# Altium PCB PMM_MSPC_22A.PcbDoc (part 3 of 5)
Units mm, origin at the board's own origin, x right, y up, seen from the top; angles counter-clockwise.
Board outline 86.91 x 61.9 mm, 4 copper layers (Top Layer, GroundPlane, MidLayer1, Bottom Layer); 159 components, 129 nets, 534 pads, 221 vias.
Unrouted connection lines stored in the file: 36.
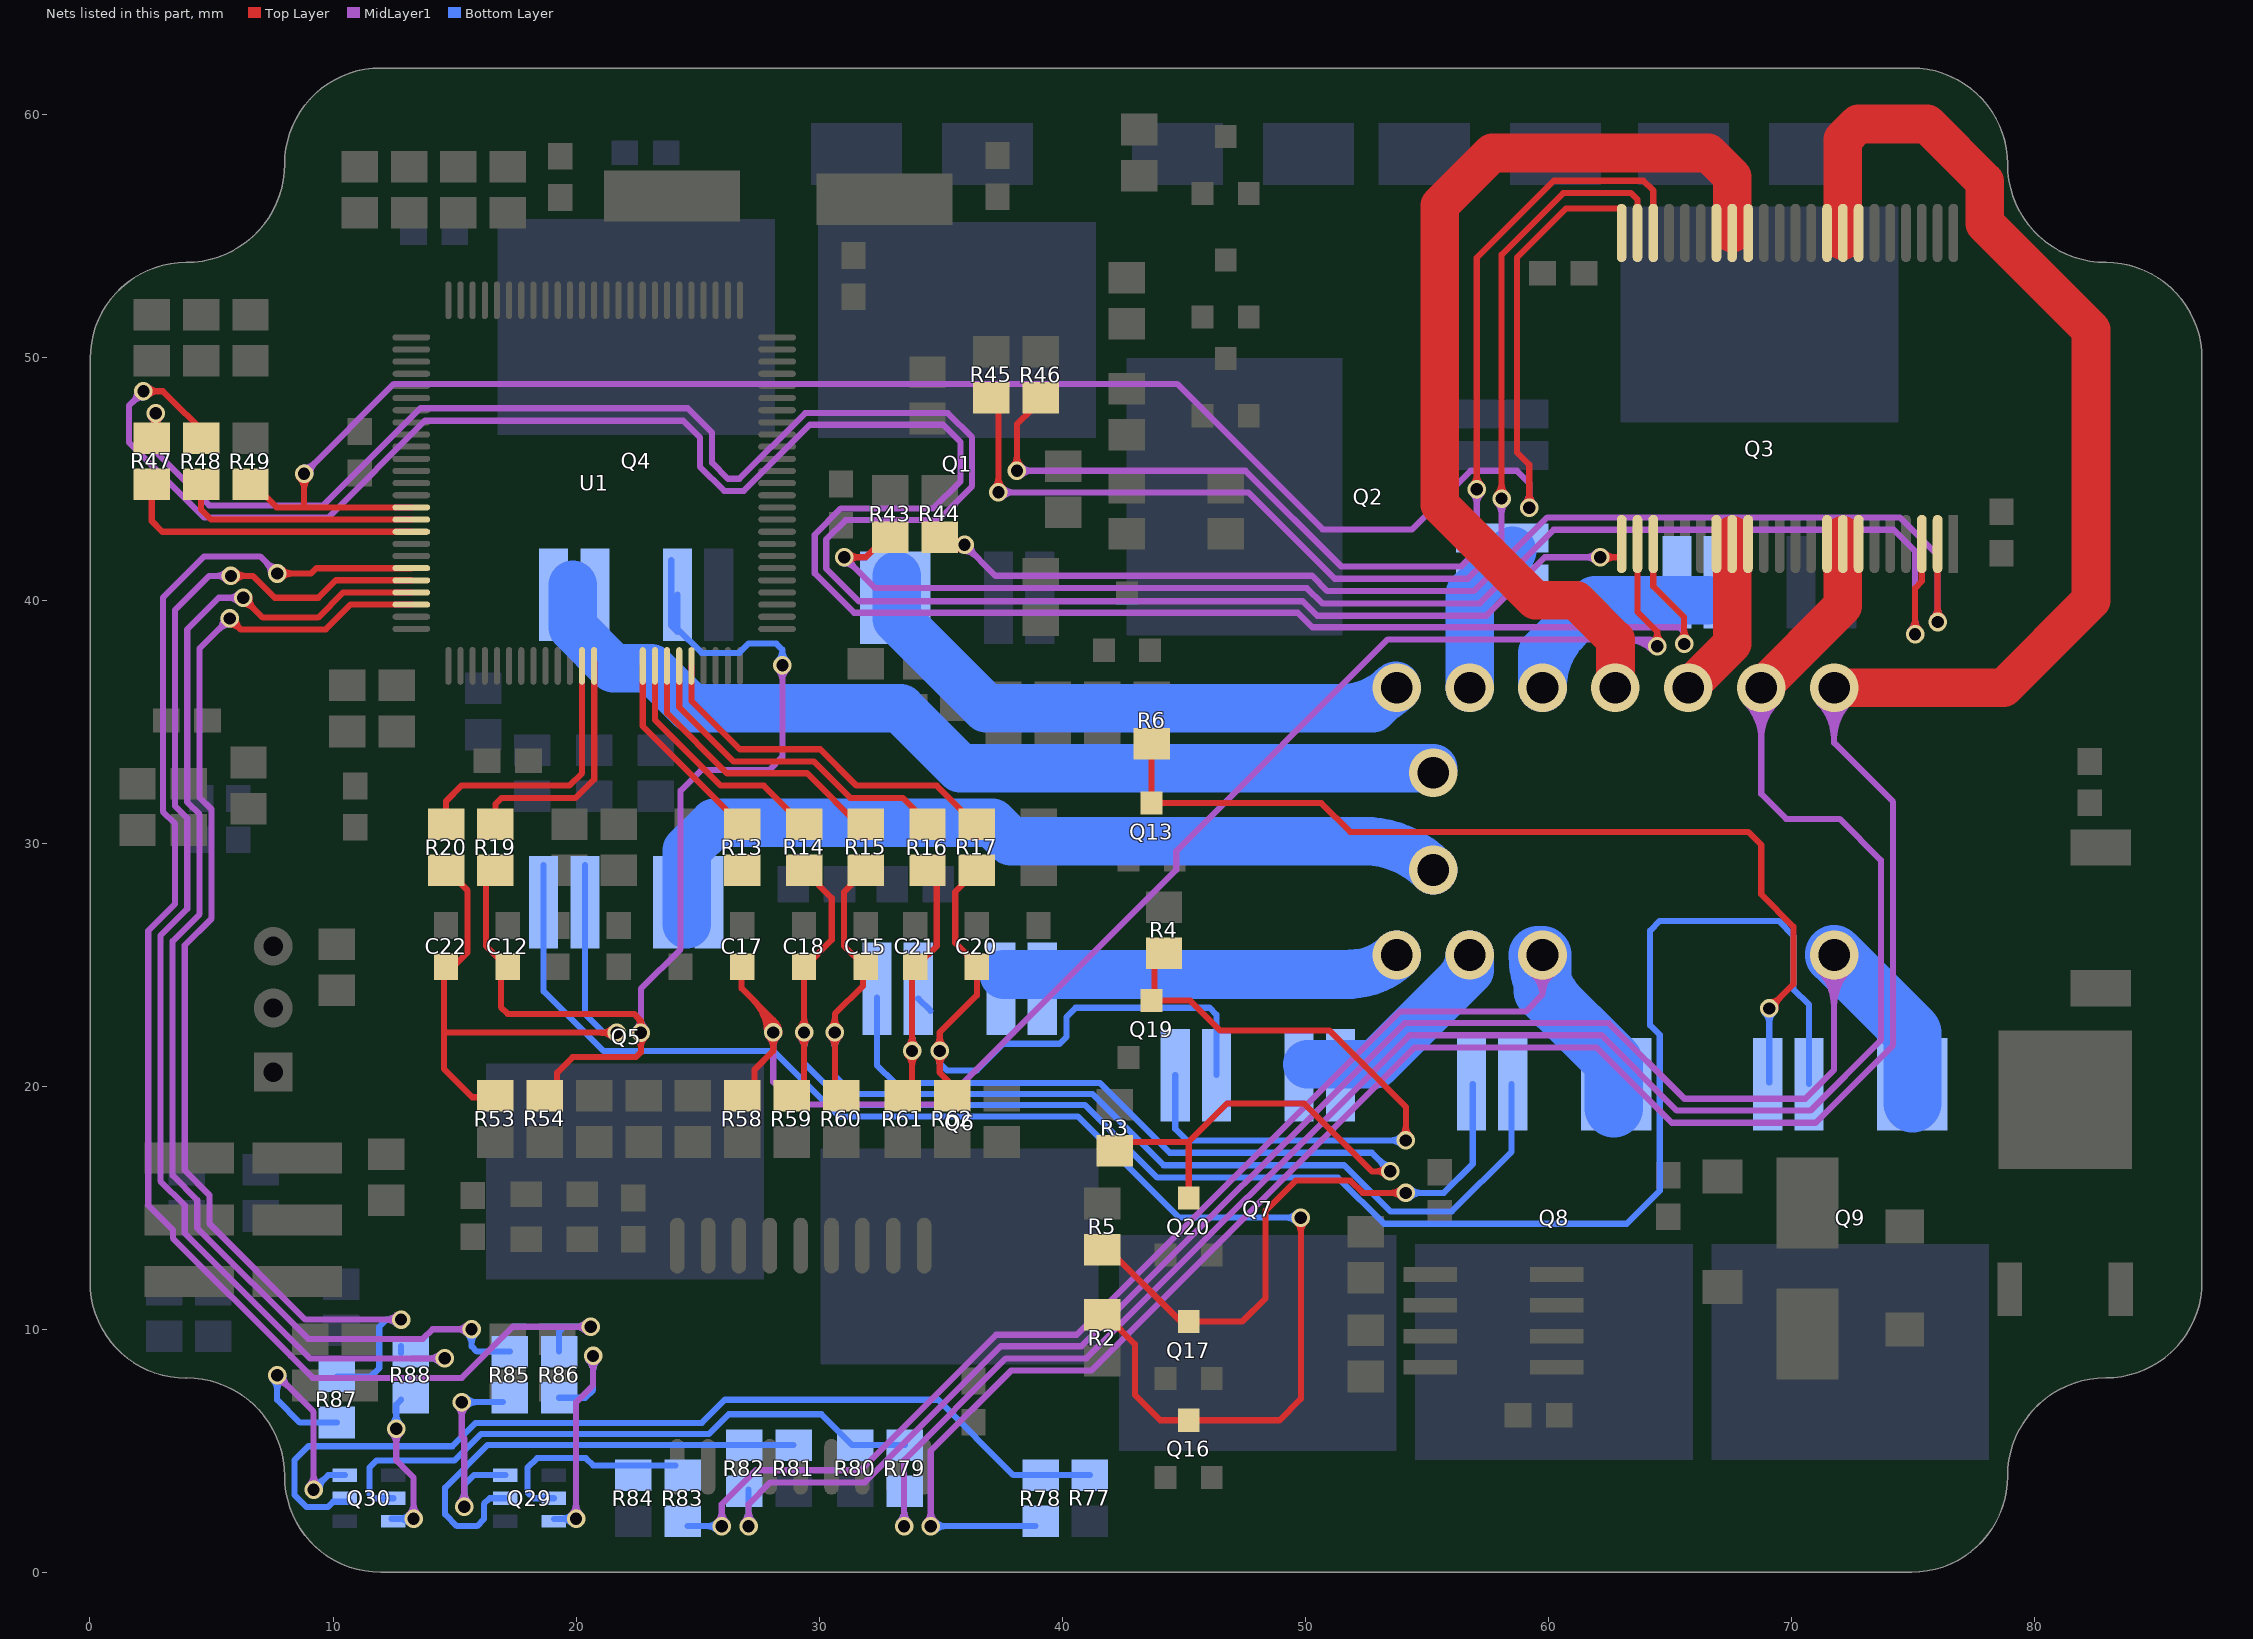
[diagram p5: the nets of this part, all layers, seen from the top]

## Via types
v1: diameter 0.762, hole 0.508, Top Layer to Bottom Layer, 138 vias
v2: diameter 2, hole 1.3, Top Layer to Bottom Layer, 26 vias
v3: diameter 1.27, hole 0.711, Top Layer to Bottom Layer, tented top, 23 vias
v4: diameter 0.762, hole 0.508, Top Layer to Bottom Layer, tented bottom, 21 vias
v5: diameter 1.27, hole 0.711, Top Layer to Bottom Layer, 7 vias
v6: diameter 0.762, hole 0.508, Top Layer to Bottom Layer, tented both sides, 5 vias
v7: diameter 2.5, hole 2.6, Top Layer to Bottom Layer, 1 vias

## Nets (pads, with @x,y where several pads share a name; then routed paths per layer and width w, separated by ;. In a path a pad name is that pad's centre, name@x,y a point inside that pad or via, vN(x,y) a via of type N, cw(c..) or ccw(c..) an arc to the next point about the centre after c; other vN are vias at no path point) (continued)
HC4feedback: C12.1 Q4.2 R19.1 R19.2 R54.1 U1.88 | length 83.9
  Top Layer w0.254: R19.2@16.302,29.325 16.302,25.769 16.911,25.16 16.911,23.255 17.191,22.975 22.395,22.975 22.67,22.7 ; R19.1@16.683,31.291 16.683,31.611 16.937,31.865 19.985,31.865 20.747,32.627 U1.88@20.747,37.453 ; R54.1@19.223,19.419 19.223,20.562 19.858,21.197 22.467,21.197 22.67,21.4 22.67,22.7 ; 22.469,22.901 cw(c21.937,22.369) v1(22.67,22.2) ; 22.469,22.901 cw(c21.937,22.369) v1(22.67,22.2) ; 22.469,22.901 cw(c21.937,22.369) v1(22.67,22.2) ; 22.469,22.901 cw(c21.937,22.369) v1(22.67,22.2) ; 22.469,22.901 cw(c21.937,22.369) v1(22.67,22.2) ; v1@22.49,22.02 cw(c22.057,21.587) 22.67,21.587 ; v1@22.49,22.02 cw(c22.057,21.587) 22.67,21.587 ; v1@22.49,22.02 cw(c22.057,21.587) 22.67,21.587 ; v1@22.49,22.02 cw(c22.057,21.587) 22.67,21.587 ; v1@22.49,22.02 cw(c22.057,21.587) 22.67,21.587 ; v1@22.52,22.405 ccw(c22.305,22.7) 22.67,22.7 ; v1@22.52,22.405 ccw(c22.305,22.7) 22.67,22.7 ; v1@22.52,22.405 ccw(c22.305,22.7) 22.67,22.7 ; v1@22.52,22.405 ccw(c22.305,22.7) 22.67,22.7 ; v1@22.52,22.405 ccw(c22.305,22.7) 22.67,22.7 ; 22.67,21.587 cw(c23.283,21.587) v1@22.85,22.02 ; 22.67,21.587 cw(c23.283,21.587) v1@22.85,22.02 ; 22.67,21.587 cw(c23.283,21.587) v1@22.85,22.02 ; 22.67,21.587 cw(c23.283,21.587) v1@22.85,22.02 ; 22.67,21.587 cw(c23.283,21.587) v1@22.85,22.02 ; 22.67,22.7 ccw(c23.035,22.7) v1@22.82,22.405 ; 22.67,22.7 ccw(c23.035,22.7) v1@22.82,22.405 ; 22.67,22.7 ccw(c23.035,22.7) v1@22.82,22.405 ; 22.67,22.7 ccw(c23.035,22.7) v1@22.82,22.405 ; 22.67,22.7 ccw(c23.035,22.7) v1@22.82,22.405
  MidLayer1 w0.254: v1(22.67,22.2) 22.67,24.009 24.303,25.642 24.303,32.159 25.152,33.008 27.946,33.008 28.494,33.556 v4(28.494,37.326) ; v1@22.49,22.38 ccw(c22.057,22.813) 22.67,22.813 ; v1@22.49,22.38 ccw(c22.057,22.813) 22.67,22.813 ; v1@22.49,22.38 ccw(c22.057,22.813) 22.67,22.813 ; v1@22.49,22.38 ccw(c22.057,22.813) 22.67,22.813 ; v1@22.49,22.38 ccw(c22.057,22.813) 22.67,22.813 ; 22.67,22.813 ccw(c23.283,22.813) v1@22.85,22.38 ; 22.67,22.813 ccw(c23.283,22.813) v1@22.85,22.38 ; 22.67,22.813 ccw(c23.283,22.813) v1@22.85,22.38 ; 22.67,22.813 ccw(c23.283,22.813) v1@22.85,22.38 ; 22.67,22.813 ccw(c23.283,22.813) v1@22.85,22.38 ; v4@28.314,37.146 cw(c27.881,36.713) 28.494,36.713 ; v4@28.314,37.146 cw(c27.881,36.713) 28.494,36.713 ; v4@28.314,37.146 cw(c27.881,36.713) 28.494,36.713 ; v4@28.314,37.146 cw(c27.881,36.713) 28.494,36.713 ; v4@28.314,37.146 cw(c27.881,36.713) 28.494,36.713 ; 28.494,36.713 cw(c29.107,36.713) v4@28.674,37.146 ; 28.494,36.713 cw(c29.107,36.713) v4@28.674,37.146 ; 28.494,36.713 cw(c29.107,36.713) v4@28.674,37.146 ; 28.494,36.713 cw(c29.107,36.713) v4@28.674,37.146 ; 28.494,36.713 cw(c29.107,36.713) v4@28.674,37.146
  Bottom Layer w0.254: Q4.2@23.922,41.644 23.922,38.954 Q4.2@24.175,38.701 ; Q4.2@24.175,40.225 24.175,38.825 25.166,37.834 26.716,37.834 27.097,38.215 28.24,38.215 28.494,37.961 v4(28.494,37.326) ; v4@28.314,37.506 ccw(c27.881,37.939) 28.494,37.939 ; v4@28.314,37.506 ccw(c27.881,37.939) 28.494,37.939 ; v4@28.314,37.506 ccw(c27.881,37.939) 28.494,37.939 ; v4@28.314,37.506 ccw(c27.881,37.939) 28.494,37.939 ; v4@28.314,37.506 ccw(c27.881,37.939) 28.494,37.939 ; 28.494,37.939 ccw(c29.107,37.939) v4@28.674,37.506 ; 28.494,37.939 ccw(c29.107,37.939) v4@28.674,37.506 ; 28.494,37.939 ccw(c29.107,37.939) v4@28.674,37.506 ; 28.494,37.939 ccw(c29.107,37.939) v4@28.674,37.506 ; 28.494,37.939 ccw(c29.107,37.939) v4@28.674,37.506
HC5drive: Q5.1 Q16.3 R2.1 | length 68.9
  Top Layer w0.254: R2.1@41.54,10.463 41.917,10.463 43,9.38 43,7.296 44.041,6.255 48.955,6.255 49.83,7.13 v4(49.83,14.593) ; v4@49.65,14.413 cw(c49.217,13.98) 49.83,13.98 ; v4@49.65,14.413 cw(c49.217,13.98) 49.83,13.98 ; v4@49.65,14.413 cw(c49.217,13.98) 49.83,13.98 ; v4@49.65,14.413 cw(c49.217,13.98) 49.83,13.98 ; v4@49.65,14.413 cw(c49.217,13.98) 49.83,13.98 ; 49.83,13.98 cw(c50.443,13.98) v4@50.01,14.413 ; 49.83,13.98 cw(c50.443,13.98) v4@50.01,14.413 ; 49.83,13.98 cw(c50.443,13.98) v4@50.01,14.413 ; 49.83,13.98 cw(c50.443,13.98) v4@50.01,14.413 ; 49.83,13.98 cw(c50.443,13.98) v4@50.01,14.413
  Bottom Layer w0.254: Q5.1@18.667,29.093 18.667,23.912 21.128,21.451 28.113,21.451 30.804,18.76 40.65,18.76 44.817,14.593 v4(49.83,14.593) ; 49.217,14.593 ccw(c49.217,15.206) v4@49.65,14.773 ; 49.217,14.593 cw(c49.217,13.98) v4@49.65,14.413 ; 49.217,14.593 ccw(c49.217,15.206) v4@49.65,14.773 ; 49.217,14.593 cw(c49.217,13.98) v4@49.65,14.413 ; 49.217,14.593 ccw(c49.217,15.206) v4@49.65,14.773 ; 49.217,14.593 cw(c49.217,13.98) v4@49.65,14.413 ; 49.217,14.593 ccw(c49.217,15.206) v4@49.65,14.773 ; 49.217,14.593 cw(c49.217,13.98) v4@49.65,14.413 ; 49.217,14.593 ccw(c49.217,15.206) v4@49.65,14.773 ; 49.217,14.593 cw(c49.217,13.98) v4@49.65,14.413
HC5feedback: C22.1 Q5.2 R20.1 R20.2 R53.1 U1.87 | length 47
  Top Layer w0.254: 14.561,22.213 v1(21.67,22.2) ; R20.2@14.651,29.391 14.651,28.944 15.54,28.055 15.54,25.515 14.561,24.536 14.561,20.713 15.728,19.546 R53.1@16.81,19.546 ; R20.1@14.651,30.976 14.651,31.738 15.286,32.373 19.731,32.373 20.247,32.889 U1.87@20.247,37.294 ; 21.057,22.201 ccw(c21.058,22.814) v1@21.491,22.38 ; 21.057,22.201 cw(c21.056,21.588) v1@21.49,22.021 ; 21.057,22.201 ccw(c21.058,22.814) v1@21.491,22.38 ; 21.057,22.201 cw(c21.056,21.588) v1@21.49,22.021 ; 21.057,22.201 ccw(c21.058,22.814) v1@21.491,22.38 ; 21.057,22.201 cw(c21.056,21.588) v1@21.49,22.021 ; 21.057,22.201 ccw(c21.058,22.814) v1@21.491,22.38 ; 21.057,22.201 cw(c21.056,21.588) v1@21.49,22.021 ; 21.057,22.201 ccw(c21.058,22.814) v1@21.491,22.38 ; 21.057,22.201 cw(c21.056,21.588) v1@21.49,22.021
  Bottom Layer w0.254: Q5.2@20.367,29.093 20.367,22.974 21.128,22.213 ; v1(21.67,22.2) 21.128,22.213 ; 21.128,22.213 ccw(c21.139,22.664) v1@21.479,22.367 ; 21.128,22.213 cw(c21.117,21.762) v1@21.471,22.042 ; 21.128,22.213 ccw(c21.139,22.664) v1@21.479,22.367 ; 21.128,22.213 cw(c21.117,21.762) v1@21.471,22.042 ; 21.128,22.213 ccw(c21.139,22.664) v1@21.479,22.367 ; 21.128,22.213 cw(c21.117,21.762) v1@21.471,22.042 ; 21.128,22.213 ccw(c21.139,22.664) v1@21.479,22.367 ; 21.128,22.213 cw(c21.117,21.762) v1@21.471,22.042 ; 21.128,22.213 ccw(c21.139,22.664) v1@21.479,22.367 ; 21.128,22.213 cw(c21.117,21.762) v1@21.471,22.042
HC6drive: Q6.1 Q20.3 R3.1 | length 50.9
  Top Layer w0.254: R3.1@42.1,17.7 45.2,17.7 46.785,19.285 49.964,19.285 52.751,16.498 v1(53.513,16.498) ; Q20.3@45.212,15.399 45.212,17.688 ; 52.9,16.498 ccw(c52.9,17.111) v1@53.333,16.678 ; 52.9,16.498 cw(c52.9,15.885) v1@53.333,16.318 ; 52.9,16.498 ccw(c52.9,17.111) v1@53.333,16.678 ; 52.9,16.498 cw(c52.9,15.885) v1@53.333,16.318 ; 52.9,16.498 ccw(c52.9,17.111) v1@53.333,16.678 ; 52.9,16.498 cw(c52.9,15.885) v1@53.333,16.318 ; 52.9,16.498 ccw(c52.9,17.111) v1@53.333,16.678 ; 52.9,16.498 cw(c52.9,15.885) v1@53.333,16.318 ; 52.9,16.498 ccw(c52.9,17.111) v1@53.333,16.678 ; 52.9,16.498 cw(c52.9,15.885) v1@53.333,16.318
  Bottom Layer w0.254: Q6.1@32.383,23.658 32.383,20.864 33.107,20.14 41.556,20.14 44.436,17.26 52.751,17.26 v1(53.513,16.498) ; 53.079,16.932 ccw(c53.513,17.365) v1@53.513,16.752 ; 53.079,16.932 cw(c52.646,16.498) v1@53.259,16.498 ; 53.079,16.932 ccw(c53.513,17.365) v1@53.513,16.752 ; 53.079,16.932 cw(c52.646,16.498) v1@53.259,16.498 ; 53.079,16.932 ccw(c53.513,17.365) v1@53.513,16.752 ; 53.079,16.932 cw(c52.646,16.498) v1@53.259,16.498 ; 53.079,16.932 ccw(c53.513,17.365) v1@53.513,16.752 ; 53.079,16.932 cw(c52.646,16.498) v1@53.259,16.498 ; 53.079,16.932 ccw(c53.513,17.365) v1@53.513,16.752 ; 53.079,16.932 cw(c52.646,16.498) v1@53.259,16.498
HC6feedback: C21.1 Q6.2 R16.1 R16.2 R61.1 U1.95 | length 40.9
  Top Layer w0.254: U1.95@24.247,37.294 24.247,35.604 26.494,33.357 29.796,33.357 31.288,31.865 33.447,31.865 R16.1@34.844,30.468 ; R61.1@33.828,19.419 33.828,24.88 33.983,25.035 34.11,25.035 34.844,25.769 R16.2@34.844,28.69 ; v1@33.648,21.271 cw(c33.215,20.838) 33.828,20.838 ; v1@33.648,21.271 cw(c33.215,20.838) 33.828,20.838 ; v1@33.648,21.271 cw(c33.215,20.838) 33.828,20.838 ; v1@33.648,21.271 cw(c33.215,20.838) 33.828,20.838 ; v1@33.648,21.271 cw(c33.215,20.838) 33.828,20.838 ; v1@33.648,21.631 ccw(c33.215,22.064) 33.828,22.064 ; v1@33.648,21.631 ccw(c33.215,22.064) 33.828,22.064 ; v1@33.648,21.631 ccw(c33.215,22.064) 33.828,22.064 ; v1@33.648,21.631 ccw(c33.215,22.064) 33.828,22.064 ; v1@33.648,21.631 ccw(c33.215,22.064) 33.828,22.064 ; 33.828,20.838 cw(c34.441,20.838) v1@34.008,21.271 ; 33.828,20.838 cw(c34.441,20.838) v1@34.008,21.271 ; 33.828,20.838 cw(c34.441,20.838) v1@34.008,21.271 ; 33.828,20.838 cw(c34.441,20.838) v1@34.008,21.271 ; 33.828,20.838 cw(c34.441,20.838) v1@34.008,21.271 ; 33.828,22.064 ccw(c34.441,22.064) v1@34.008,21.631 ; 33.828,22.064 ccw(c34.441,22.064) v1@34.008,21.631 ; 33.828,22.064 ccw(c34.441,22.064) v1@34.008,21.631 ; 33.828,22.064 ccw(c34.441,22.064) v1@34.008,21.631 ; 33.828,22.064 ccw(c34.441,22.064) v1@34.008,21.631
  Bottom Layer w0.254: v1(33.828,21.451) Q6.2@33.828,22.975 ; Q6.2@34.083,23.609 Q6.2@34.59,23.102 ; v1@33.648,21.631 ccw(c33.215,22.064) 33.828,22.064 ; v1@33.648,21.631 ccw(c33.215,22.064) 33.828,22.064 ; v1@33.648,21.631 ccw(c33.215,22.064) 33.828,22.064 ; v1@33.648,21.631 ccw(c33.215,22.064) 33.828,22.064 ; v1@33.648,21.631 ccw(c33.215,22.064) 33.828,22.064 ; 33.828,22.064 ccw(c34.441,22.064) v1@34.008,21.631 ; 33.828,22.064 ccw(c34.441,22.064) v1@34.008,21.631 ; 33.828,22.064 ccw(c34.441,22.064) v1@34.008,21.631 ; 33.828,22.064 ccw(c34.441,22.064) v1@34.008,21.631 ; 33.828,22.064 ccw(c34.441,22.064) v1@34.008,21.631
HC7drive: Q7.1 Q19.3 R4.1 | length 36.9
  Top Layer w0.254: Q19.3@43.688,23.527 45.273,23.527 46.5,22.3 51,22.3 54.148,19.152 v1(54.148,17.768) ; Q19.3@43.8,23.7 R4.1@43.8,25.4 ; v1@53.968,17.948 ccw(c53.535,18.381) 54.148,18.381 ; v1@53.968,17.948 ccw(c53.535,18.381) 54.148,18.381 ; v1@53.968,17.948 ccw(c53.535,18.381) 54.148,18.381 ; v1@53.968,17.948 ccw(c53.535,18.381) 54.148,18.381 ; v1@53.968,17.948 ccw(c53.535,18.381) 54.148,18.381 ; 54.148,18.381 ccw(c54.761,18.381) v1@54.328,17.948 ; 54.148,18.381 ccw(c54.761,18.381) v1@54.328,17.948 ; 54.148,18.381 ccw(c54.761,18.381) v1@54.328,17.948 ; 54.148,18.381 ccw(c54.761,18.381) v1@54.328,17.948 ; 54.148,18.381 ccw(c54.761,18.381) v1@54.328,17.948
  Bottom Layer w0.254: Q7.1@44.656,20.457 44.656,18.244 45.132,17.768 v1(54.148,17.768) ; 53.535,17.768 ccw(c53.535,18.381) v1@53.968,17.948 ; 53.535,17.768 cw(c53.535,17.155) v1@53.968,17.588 ; 53.535,17.768 ccw(c53.535,18.381) v1@53.968,17.948 ; 53.535,17.768 cw(c53.535,17.155) v1@53.968,17.588 ; 53.535,17.768 ccw(c53.535,18.381) v1@53.968,17.948 ; 53.535,17.768 cw(c53.535,17.155) v1@53.968,17.588 ; 53.535,17.768 ccw(c53.535,18.381) v1@53.968,17.948 ; 53.535,17.768 cw(c53.535,17.155) v1@53.968,17.588 ; 53.535,17.768 ccw(c53.535,18.381) v1@53.968,17.948 ; 53.535,17.768 cw(c53.535,17.155) v1@53.968,17.588
HC7feedback: C20.1 Q7.2 R17.1 R17.2 R62.1 U1.96 | length 59.7
  Top Layer w0.254: U1.96@24.747,37.294 24.747,35.866 26.748,33.865 30.05,33.865 31.542,32.373 34.844,32.373 36.495,30.722 R17.1@36.749,30.722 ; R62.1@36.114,19.419 34.971,20.562 34.971,22.213 36.495,23.737 36.495,25.007 35.606,25.896 35.606,27.994 R17.2@36.495,28.883 ; v1@34.791,21.271 cw(c34.358,20.838) 34.971,20.838 ; v1@34.791,21.271 cw(c34.358,20.838) 34.971,20.838 ; v1@34.791,21.271 cw(c34.358,20.838) 34.971,20.838 ; v1@34.791,21.271 cw(c34.358,20.838) 34.971,20.838 ; v1@34.791,21.271 cw(c34.358,20.838) 34.971,20.838 ; v1@34.791,21.631 ccw(c34.358,22.064) 34.971,22.064 ; v1@34.791,21.631 ccw(c34.358,22.064) 34.971,22.064 ; v1@34.791,21.631 ccw(c34.358,22.064) 34.971,22.064 ; v1@34.791,21.631 ccw(c34.358,22.064) 34.971,22.064 ; v1@34.791,21.631 ccw(c34.358,22.064) 34.971,22.064 ; 34.971,20.838 cw(c35.584,20.838) v1@35.151,21.271 ; 34.971,20.838 cw(c35.584,20.838) v1@35.151,21.271 ; 34.971,20.838 cw(c35.584,20.838) v1@35.151,21.271 ; 34.971,20.838 cw(c35.584,20.838) v1@35.151,21.271 ; 34.971,20.838 cw(c35.584,20.838) v1@35.151,21.271 ; 34.971,22.064 ccw(c35.584,22.064) v1@35.151,21.631 ; 34.971,22.064 ccw(c35.584,22.064) v1@35.151,21.631 ; 34.971,22.064 ccw(c35.584,22.064) v1@35.151,21.631 ; 34.971,22.064 ccw(c35.584,22.064) v1@35.151,21.631 ; 34.971,22.064 ccw(c35.584,22.064) v1@35.151,21.631
  Bottom Layer w0.254: v1(34.971,21.451) 34.971,20.943 ; Q7.2@46.356,20.457 46.356,22.944 46.071,23.229 40.559,23.229 40.178,22.848 40.178,22.023 39.9,21.745 37.591,21.745 36.499,20.653 35.261,20.653 34.971,20.943 ; v1@34.819,21.248 cw(c34.59,20.943) 34.971,20.943 ; v1@34.819,21.248 cw(c34.59,20.943) 34.971,20.943 ; v1@34.819,21.248 cw(c34.59,20.943) 34.971,20.943 ; v1@34.819,21.248 cw(c34.59,20.943) 34.971,20.943 ; v1@34.819,21.248 cw(c34.59,20.943) 34.971,20.943 ; v1@34.819,21.248 cw(c34.59,20.943) 34.971,20.943 ; v1@34.819,21.248 cw(c34.59,20.943) 34.971,20.943 ; v1@34.819,21.248 cw(c34.59,20.943) 34.971,20.943 ; v1@34.819,21.248 cw(c34.59,20.943) 34.971,20.943 ; v1@34.819,21.248 cw(c34.59,20.943) 34.971,20.943 ; 34.971,20.943 cw(c35.352,20.943) v1@35.123,21.248 ; 34.971,20.943 cw(c35.352,20.943) v1@35.123,21.248 ; 34.971,20.943 cw(c35.352,20.943) v1@35.123,21.248 ; 34.971,20.943 cw(c35.352,20.943) v1@35.123,21.248 ; 34.971,20.943 cw(c35.352,20.943) v1@35.123,21.248 ; 34.971,20.943 cw(c35.352,20.943) v1@35.123,21.248 ; 34.971,20.943 cw(c35.352,20.943) v1@35.123,21.248 ; 34.971,20.943 cw(c35.352,20.943) v1@35.123,21.248 ; 34.971,20.943 cw(c35.352,20.943) v1@35.123,21.248 ; 34.971,20.943 cw(c35.352,20.943) v1@35.123,21.248
HC8drive: Q8.1 Q17.3 R5.1 | length 34.5
  Top Layer w0.254: R5.1@41.8,13.4 44.881,10.319 47.419,10.319 48.375,11.275 48.375,14.875 49.617,16.117 51.862,16.117 52.37,15.609 v1(54.148,15.609) ; 53.535,15.609 ccw(c53.535,16.222) v1@53.968,15.789 ; 53.535,15.609 cw(c53.535,14.996) v1@53.968,15.429 ; 53.535,15.609 ccw(c53.535,16.222) v1@53.968,15.789 ; 53.535,15.609 cw(c53.535,14.996) v1@53.968,15.429 ; 53.535,15.609 ccw(c53.535,16.222) v1@53.968,15.789 ; 53.535,15.609 cw(c53.535,14.996) v1@53.968,15.429 ; 53.535,15.609 ccw(c53.535,16.222) v1@53.968,15.789 ; 53.535,15.609 cw(c53.535,14.996) v1@53.968,15.429 ; 53.535,15.609 ccw(c53.535,16.222) v1@53.968,15.789 ; 53.535,15.609 cw(c53.535,14.996) v1@53.968,15.429
  Bottom Layer w0.254: v1(54.148,15.609) 55.709,15.609 56.9,16.8 Q8.1@56.9,20.088 ; v1@54.328,15.429 cw(c54.761,14.996) 54.761,15.609 ; v1@54.328,15.429 cw(c54.761,14.996) 54.761,15.609 ; v1@54.328,15.429 cw(c54.761,14.996) 54.761,15.609 ; v1@54.328,15.429 cw(c54.761,14.996) 54.761,15.609 ; v1@54.328,15.429 cw(c54.761,14.996) 54.761,15.609 ; v1@54.328,15.789 ccw(c54.761,16.222) 54.761,15.609 ; v1@54.328,15.789 ccw(c54.761,16.222) 54.761,15.609 ; v1@54.328,15.789 ccw(c54.761,16.222) 54.761,15.609 ; v1@54.328,15.789 ccw(c54.761,16.222) 54.761,15.609 ; v1@54.328,15.789 ccw(c54.761,16.222) 54.761,15.609
HC8feedback: C15.1 Q8.2 R15.1 R15.2 R60.1 U1.94 | length 72.6
  Top Layer w0.254: U1.94@23.747,37.294 23.747,35.342 26.208,32.881 29.51,32.881 R15.1@31.766,30.625 ; R60.1@30.653,19.546 30.653,22.975 31.811,24.133 31.811,24.992 31.034,25.769 31.034,27.994 R15.2@31.923,28.883 ; v1@30.473,22.033 cw(c30.04,21.6) 30.653,21.6 ; v1@30.473,22.033 cw(c30.04,21.6) 30.653,21.6 ; v1@30.473,22.033 cw(c30.04,21.6) 30.653,21.6 ; v1@30.473,22.033 cw(c30.04,21.6) 30.653,21.6 ; v1@30.473,22.033 cw(c30.04,21.6) 30.653,21.6 ; v1@30.473,22.393 ccw(c30.04,22.826) 30.653,22.826 ; v1@30.473,22.393 ccw(c30.04,22.826) 30.653,22.826 ; v1@30.473,22.393 ccw(c30.04,22.826) 30.653,22.826 ; v1@30.473,22.393 ccw(c30.04,22.826) 30.653,22.826 ; v1@30.473,22.393 ccw(c30.04,22.826) 30.653,22.826 ; 30.653,21.6 cw(c31.266,21.6) v1@30.833,22.033 ; 30.653,21.6 cw(c31.266,21.6) v1@30.833,22.033 ; 30.653,21.6 cw(c31.266,21.6) v1@30.833,22.033 ; 30.653,21.6 cw(c31.266,21.6) v1@30.833,22.033 ; 30.653,21.6 cw(c31.266,21.6) v1@30.833,22.033 ; 30.653,22.826 ccw(c31.266,22.826) v1@30.833,22.393 ; 30.653,22.826 ccw(c31.266,22.826) v1@30.833,22.393 ; 30.653,22.826 ccw(c31.266,22.826) v1@30.833,22.393 ; 30.653,22.826 ccw(c31.266,22.826) v1@30.833,22.393 ; 30.653,22.826 ccw(c31.266,22.826) v1@30.833,22.393
  Bottom Layer w0.254: v1(30.653,22.213) 30.653,20.435 31.403,19.685 41.249,19.685 44.182,16.752 51.608,16.752 53.513,14.847 56.047,14.847 58.5,17.3 Q8.2@58.5,20.088 ; v1@30.473,22.033 cw(c30.04,21.6) 30.653,21.6 ; v1@30.473,22.033 cw(c30.04,21.6) 30.653,21.6 ; v1@30.473,22.033 cw(c30.04,21.6) 30.653,21.6 ; v1@30.473,22.033 cw(c30.04,21.6) 30.653,21.6 ; v1@30.473,22.033 cw(c30.04,21.6) 30.653,21.6 ; 30.653,21.6 cw(c31.266,21.6) v1@30.833,22.033 ; 30.653,21.6 cw(c31.266,21.6) v1@30.833,22.033 ; 30.653,21.6 cw(c31.266,21.6) v1@30.833,22.033 ; 30.653,21.6 cw(c31.266,21.6) v1@30.833,22.033 ; 30.653,21.6 cw(c31.266,21.6) v1@30.833,22.033
HC9drive: Q9.1 Q13.3 R6.1 | length 40.9
  Top Layer w0.254: R6.1@43.688,34.102 Q13.3@43.688,31.655 50.675,31.655 51.862,30.468 68.232,30.468 68.77,29.93 68.77,27.9 70.1,26.57 70.1,24.2 v6(69.1,23.2) ; v6@69.1,23.454 ccw(c69.1,24.067) 69.534,23.634 ccw(c69.967,23.2) v6@69.354,23.2
  Bottom Layer w0.254: v6@68.92,23.02 cw(c68.487,22.587) 69.1,22.587 cw(c69.713,22.587) v6@69.28,23.02 ; Q9.1@69.1,20.148 v6(69.1,23.2)
HC9feedback: C18.1 Q9.2 R14.1 R14.2 R59.1 U1.93 | length 97.9
  Top Layer w0.254: U1.93@23.247,37.294 23.247,35.08 25.954,32.373 27.732,32.373 R14.1@29.129,30.976 ; R59.1@29.383,19.546 29.383,24.88 30.526,26.023 30.526,27.74 R14.2@29.383,28.883 ; v1@29.203,22.033 cw(c28.77,21.6) 29.383,21.6 ; v1@29.203,22.033 cw(c28.77,21.6) 29.383,21.6 ; v1@29.203,22.033 cw(c28.77,21.6) 29.383,21.6 ; v1@29.203,22.033 cw(c28.77,21.6) 29.383,21.6 ; v1@29.203,22.033 cw(c28.77,21.6) 29.383,21.6 ; v1@29.203,22.393 ccw(c28.77,22.826) 29.383,22.826 ; v1@29.203,22.393 ccw(c28.77,22.826) 29.383,22.826 ; v1@29.203,22.393 ccw(c28.77,22.826) 29.383,22.826 ; v1@29.203,22.393 ccw(c28.77,22.826) 29.383,22.826 ; v1@29.203,22.393 ccw(c28.77,22.826) 29.383,22.826 ; 29.383,21.6 cw(c29.996,21.6) v1@29.563,22.033 ; 29.383,21.6 cw(c29.996,21.6) v1@29.563,22.033 ; 29.383,21.6 cw(c29.996,21.6) v1@29.563,22.033 ; 29.383,21.6 cw(c29.996,21.6) v1@29.563,22.033 ; 29.383,21.6 cw(c29.996,21.6) v1@29.563,22.033 ; 29.383,22.826 ccw(c29.996,22.826) v1@29.563,22.393 ; 29.383,22.826 ccw(c29.996,22.826) v1@29.563,22.393 ; 29.383,22.826 ccw(c29.996,22.826) v1@29.563,22.393 ; 29.383,22.826 ccw(c29.996,22.826) v1@29.563,22.393 ; 29.383,22.826 ccw(c29.996,22.826) v1@29.563,22.393
  Bottom Layer w0.254: v1(29.383,22.213) 29.383,20.943 31.101,19.225 40.947,19.225 43.928,16.244 51.354,16.244 53.259,14.339 63.239,14.339 64.597,15.697 64.597,22.116 64.2,22.512 64.2,26.4 64.6,26.8 69.5,26.8 70.1,26.2 70.1,24 70.74,23.36 Q9.2@70.74,20.088 ; v1@29.203,22.033 cw(c28.77,21.6) 29.383,21.6 ; v1@29.203,22.033 cw(c28.77,21.6) 29.383,21.6 ; v1@29.203,22.033 cw(c28.77,21.6) 29.383,21.6 ; v1@29.203,22.033 cw(c28.77,21.6) 29.383,21.6 ; v1@29.203,22.033 cw(c28.77,21.6) 29.383,21.6 ; 29.383,21.6 cw(c29.996,21.6) v1@29.563,22.033 ; 29.383,21.6 cw(c29.996,21.6) v1@29.563,22.033 ; 29.383,21.6 cw(c29.996,21.6) v1@29.563,22.033 ; 29.383,21.6 cw(c29.996,21.6) v1@29.563,22.033 ; 29.383,21.6 cw(c29.996,21.6) v1@29.563,22.033
HI_current1: Q1.4 Q1.5 | length 33.6
  Bottom Layer w2: 33.193,41.009 33.193,39.231 36.876,35.548 52.788,35.548 53.725,36.485 cw(c51.463,38.747) 51.463,35.548 ; 51.713,35.548 ccw(c51.713,38.457) v2(53.77,36.4) ; 51.713,35.548 ccw(c51.713,38.457) v2(53.77,36.4) ; 51.713,35.548 ccw(c51.713,38.457) v2(53.77,36.4)
HI_current2: Q2.4 Q2.5 | length 6.4
  Bottom Layer w2: v2(56.77,36.4) 56.77,40.27 Q2.4@58.525,42.025
HI_current3: Q3.4 Q3.5 | length 17.4
  Bottom Layer w2: Q3.4@66.594,39.993 61.919,39.993 59.77,37.844 v2(59.77,36.4) ; v2(59.77,36.4) cw(c63.256,36.4) 60.791,38.865 ; v2(59.77,36.4) cw(c63.256,36.4) 60.791,38.865 ; v2(59.77,36.4) cw(c63.256,36.4) 60.791,38.865
HI_current4: Q4.4 Q4.5 | length 39.6
  Bottom Layer w2: 19.858,40.628 19.858,38.882 21.541,37.199 23.101,37.199 24.752,35.548 33.352,35.548 35.815,33.085 v2@55.27,33.085
  other v2: 55.27,32.9
HI_current5: Q5.4 Q5.5 | length 34.9
  Bottom Layer w2: 24.557,26.658 24.557,29.706 25.7,30.849 37.13,30.849 37.892,30.087 52.404,30.087 cw(c52.404,26.034) v2(55.27,28.9)
HI_current6: Q6.4 Q6.5 | length 16.4
  Bottom Layer w2: Q6.4@37.6,24.6 51.901,24.6 ; 51.901,24.626 ccw(c51.901,27.269) v2(53.77,25.4)
HI_current7: Q7.4 Q7.5 | length 12.5
  Bottom Layer w2: Q7.4@50.1,20.9 52.9,20.9 56.77,24.77 v2(56.77,25.4) ; 56.325,24.325 ccw(c55.249,25.4) v2(56.77,25.4) ; 56.325,24.325 ccw(c55.249,25.4) v2(56.77,25.4) ; 56.325,24.325 ccw(c55.249,25.4) v2(56.77,25.4)
HI_current8: Q8.4 Q8.5 R83.2 | length 66.7
  MidLayer1 w0.254: v1@25.82,2.08 ccw(c25.387,2.513) 26,2.513 ccw(c26.613,2.513) v1@26.18,2.08 ; v1(26,1.9) 26,2.8 27.4,4.2 31.714,4.2 37.289,9.775 40.603,9.775 53.903,23.075 59.075,23.075 59.77,23.77 ; v2@59.286,24.673 cw(c58.685,23.77) 59.77,23.77 ; v2@59.427,24.885 cw(c59.001,24.244) 59.77,24.244 cw(c60.539,24.244) v2@60.113,24.885 ; v2(59.77,25.4) 59.77,23.77 ; v2@60.254,24.673 ccw(c60.855,23.77) 59.77,23.77
  Bottom Layer w0.254: R83.2@24.6,1.9 v1(26,1.9) ; v1@25.82,1.72 ccw(c25.387,1.287) 25.387,1.9 ccw(c25.387,2.513) v1@25.82,2.08
  Bottom Layer w2.4: v2(59.77,25.4) 59.77,23.93 62.7,21 62.7,19.1 ; v2@59.57,25.4 ccw(c62.636,25.4) 60.468,23.232 ; v2@59.57,25.4 ccw(c62.636,25.4) 60.468,23.232 ; v2@59.57,25.4 ccw(c62.636,25.4) 60.468,23.232
HI_current9: Q9.4 Q9.5 R82.2 | length 76.9
  MidLayer1 w0.254: v1@26.92,2.08 ccw(c26.487,2.513) 27.1,2.513 ccw(c27.713,2.513) v1@27.28,2.08 ; v1(27.1,1.9) 27.1,2.8 28,3.7 31.886,3.7 37.486,9.3 40.8,9.3 54.1,22.6 62.5,22.6 65.615,19.485 70.585,19.485 71.77,20.67 v2(71.77,25.4) ; v2@71.153,24.783 cw(c69.662,23.292) 71.77,23.292 cw(c73.878,23.292) v2@72.387,24.783 ; v2@71.332,24.962 cw(c70.276,23.906) 71.77,23.906 cw(c73.264,23.906) v2@72.208,24.962
  Bottom Layer w0.254: v1@26.92,2.08 ccw(c26.487,2.513) 27.1,2.513 ccw(c27.713,2.513) v1@27.28,2.08 ; v1(27.1,1.9) R82.2@27.1,3.4
  Bottom Layer w2.4: v2(71.77,25.4) 71.77,25.43 75,22.2 75,19.3
HIC8_out: Q29.6 R85.2 | length 12.6
  MidLayer1 w0.254: v1@15.12,6.82 cw(c14.687,6.387) 15.3,6.387 cw(c15.913,6.387) v1@15.48,6.82 ; v1@15.22,2.88 ccw(c14.787,3.313) 15.4,3.313 ccw(c16.013,3.313) v1@15.58,2.88 ; v1(15.3,7) 15.3,5.6 15.4,5.5 v1(15.4,2.7)
  Bottom Layer w0.254: v1@15.22,2.88 ccw(c14.787,3.313) 15.4,3.313 ccw(c16.013,3.313) v1@15.58,2.88 ; v1(15.3,7) R85.2@17,7 ; v1(15.4,2.7) 15.4,3.6 15.798,3.998 Q29.6@17.088,3.998 ; v1@15.48,6.82 cw(c15.913,6.387) 15.913,7 cw(c15.913,7.613) v1@15.48,7.18
HIC8_ser: R85.1 U1.72 | length 55.8
  Top Layer w0.254: v1@6.3,39.846 cw(c6.3,39.233) 6.734,39.666 cw(c7.167,40.1) v1@6.554,40.1 ; v1(6.3,40.1) 7.115,39.285 9.385,39.285 10.419,40.319 U1.72@13.222,40.319
  MidLayer1 w0.254: v1@6.12,39.92 ccw(c5.687,39.487) 5.687,40.1 ccw(c5.687,40.713) v1@6.12,40.28 ; v1(6.3,40.1) 5.3,40.1 4,38.8 4,31.696 4.511,31.185 4.511,27.085 3.4,25.974 3.4,16.328 4.411,15.317 4.411,14.166 8.977,9.6 13.7,9.6 14.1,10 v1(15.7,10) ; v1@15.52,9.82 ccw(c15.087,9.387) 15.087,10 ccw(c15.087,10.613) v1@15.52,10.18
  Bottom Layer w0.254: v1@15.52,9.82 cw(c15.087,9.387) 15.7,9.387 cw(c16.313,9.387) v1@15.88,9.82 ; v1(15.7,10) 15.7,9.3 15.922,9.078 R85.1@17.272,9.078
HIC8_split: Q29.2 R83.1 R84.1 | length 8.6
  Bottom Layer w0.254: Q29.2@19.088,3.048 18.252,3.048 18,3.3 18,4.3 18.4,4.7 20.4,4.7 20.702,4.398 R83.1@24.084,4.398
HIC9_out: Q29.3 R86.2 | length 14.7
  MidLayer1 w0.254: v1@19.82,2.38 ccw(c19.387,2.813) 20,2.813 ccw(c20.613,2.813) v1@20.18,2.38 ; v1(20,2.2) 20,7 20.7,7.7 v1(20.7,8.9) ; v1@20.52,8.72 cw(c20.087,8.287) 20.7,8.287 cw(c21.313,8.287) v1@20.88,8.72
  Bottom Layer w0.254: Q29.3@19.098,2.198 v1@20,2.198 ; R86.2@19.304,7.178 20.378,7.178 20.7,7.5 v1(20.7,8.9) ; Q29.3@19.382,2.198 ccw(c19.382,2.818) v1@19.82,2.38 ; Q29.3@19.392,2.198 cw(c19.392,1.592) v1@19.82,2.02 ; v1@20.52,8.72 cw(c20.087,8.287) 20.7,8.287 cw(c21.313,8.287) v1@20.88,8.72
HIC9_ser: R86.1 U1.70 | length 65.2
  Top Layer w0.254: v1(7.7,41.1) 9.1,41.1 9.319,41.319 U1.70@13.222,41.319 ; v1@7.88,40.92 cw(c8.313,40.487) 8.313,41.1 cw(c8.313,41.713) v1@7.88,41.28
  MidLayer1 w0.254: v1@7.446,41.1 ccw(c6.833,41.1) 7.266,41.534 ccw(c7.7,41.967) v1@7.7,41.354 ; v1(7.7,41.1) 7,41.8 4.7,41.8 3,40.1 3,31.3 3.5,30.8 3.5,27.5 2.4,26.4 2.4,15.1 3.411,14.089 3.411,13.751 8.262,8.9 8.269,8.9 9.169,8 15.3,8 17.4,10.1 v1(20.6,10.1) ; v1@20.42,9.92 ccw(c19.987,9.487) 19.987,10.1 ccw(c19.987,10.713) v1@20.42,10.28
  Bottom Layer w0.254: R86.1@19.304,9.078 19.304,9.904 19.5,10.1 v1(20.6,10.1) ; v1@20.42,9.92 ccw(c19.987,9.487) 19.987,10.1 ccw(c19.987,10.713) v1@20.42,10.28
HIC9_split: Q29.5 R81.1 R82.1 | length 19.7
  Bottom Layer w0.254: Q29.5@17.088,3.048 16.448,3.048 16.211,2.811 16.211,2.185 15.926,1.9 15.1,1.9 14.611,2.389 14.611,3.485 16.356,5.23 R81.1@28.956,5.23
HiLo1: pad.29 pad.30 pad.31 | length 39.5
  Top Layer w1.6: v2(62.77,36.4) 62.77,38.38 61.15,40 59.475,40 55.545,43.93 55.545,56.249 57.704,58.408 66.594,58.408 67.58,57.422 pad.30@67.58,55.114
HiLo2: pad.14 pad.15 pad.16 | length 7
  Top Layer w1.6: v2(65.77,36.4) 67.58,38.21 pad.15@67.58,42.66
HiLo3: pad.7 pad.8 pad.9 R79.2 | length 87.1
  Top Layer w1.6: v2(68.77,36.4) 72.13,39.76 pad.8@72.13,42.66
  MidLayer1 w0.254: v1@33.32,2.08 ccw(c32.887,2.513) 33.5,2.513 ccw(c34.113,2.513) v1@33.68,2.08 ; v1(33.5,1.9) 33.5,4.607 37.693,8.8 41,8.8 54.3,22.1 62.2,22.1 65.3,19 70.8,19 73.7,21.9 73.7,29.3 72,31 69.8,31 68.77,32.03 v2(68.77,36.4) ; v2@68.153,35.783 cw(c66.662,34.292) 68.77,34.292 cw(c70.878,34.292) v2@69.387,35.783 ; v2@68.332,35.962 cw(c67.276,34.906) 68.77,34.906 cw(c70.264,34.906) v2@69.208,35.962
  Bottom Layer w0.254: v1@33.32,2.08 ccw(c32.887,2.513) 33.5,2.513 ccw(c34.113,2.513) v1@33.68,2.08 ; v1(33.5,1.9) R79.2@33.5,3.33
HiLo4: pad.36 pad.37 pad.38 R78.2 | length 122.1
  Top Layer w1.6: v2(71.77,36.4) 78.749,36.4 82.342,39.993 82.342,51.128 77.97,55.5 77.97,57.226 75.596,59.6 72.77,59.6 72.13,58.96 pad.37@72.13,54.8
  MidLayer1 w0.254: v1@34.42,2.08 ccw(c33.987,2.513) 34.6,2.513 ccw(c35.213,2.513) v1@34.78,2.08 ; v1(34.6,1.9) 34.6,5 37.9,8.3 41.207,8.3 54.507,21.6 61.993,21.6 65.093,18.5 71.007,18.5 74.2,21.693 74.2,31.7 71.77,34.13 v2(71.77,36.4) ; v2@71.153,35.783 cw(c69.662,34.292) 71.77,34.292 cw(c73.878,34.292) v2@72.387,35.783 ; v2@71.332,35.962 cw(c70.276,34.906) 71.77,34.906 cw(c73.264,34.906) v2@72.208,35.962
  Bottom Layer w0.254: v1(34.6,1.9) R78.2@38.9,1.9 ; v1@34.78,1.72 cw(c35.213,1.287) 35.213,1.9 cw(c35.213,2.513) v1@34.78,2.08
HL1_drive: pad.25 R46.1 | length 66
  Top Layer w0.254: v1(38.146,45.327) 38.146,47.246 38.767,47.867 R46.1@39.289,47.867 ; v1(57.069,44.565) 57.069,54.09 60.244,57.265 63.927,57.265 64.33,56.862 pad.25@64.33,55.114 ; v1@37.966,45.507 ccw(c37.533,45.94) 38.146,45.94 ; v1@37.966,45.507 ccw(c37.533,45.94) 38.146,45.94 ; v1@37.966,45.507 ccw(c37.533,45.94) 38.146,45.94 ; v1@37.966,45.507 ccw(c37.533,45.94) 38.146,45.94 ; v1@37.966,45.507 ccw(c37.533,45.94) 38.146,45.94 ; 38.146,45.94 ccw(c38.759,45.94) v1@38.326,45.507 ; 38.146,45.94 ccw(c38.759,45.94) v1@38.326,45.507 ; 38.146,45.94 ccw(c38.759,45.94) v1@38.326,45.507 ; 38.146,45.94 ccw(c38.759,45.94) v1@38.326,45.507 ; 38.146,45.94 ccw(c38.759,45.94) v1@38.326,45.507 ; v1@56.889,44.745 ccw(c56.456,45.178) 57.069,45.178 ; v1@56.889,44.745 ccw(c56.456,45.178) 57.069,45.178 ; v1@56.889,44.745 ccw(c56.456,45.178) 57.069,45.178 ; v1@56.889,44.745 ccw(c56.456,45.178) 57.069,45.178 ; v1@56.889,44.745 ccw(c56.456,45.178) 57.069,45.178 ; 57.069,45.178 ccw(c57.682,45.178) v1@57.249,44.745 ; 57.069,45.178 ccw(c57.682,45.178) v1@57.249,44.745 ; 57.069,45.178 ccw(c57.682,45.178) v1@57.249,44.745 ; 57.069,45.178 ccw(c57.682,45.178) v1@57.249,44.745 ; 57.069,45.178 ccw(c57.682,45.178) v1@57.249,44.745
  MidLayer1 w0.254: v1(38.146,45.327) 47.544,45.327 51.48,41.391 56.435,41.391 57.069,42.025 v1(57.069,44.565) ; v1@38.326,45.147 cw(c38.759,44.714) 38.759,45.327 ; v1@38.326,45.147 cw(c38.759,44.714) 38.759,45.327 ; v1@38.326,45.147 cw(c38.759,44.714) 38.759,45.327 ; v1@38.326,45.147 cw(c38.759,44.714) 38.759,45.327 ; v1@38.326,45.147 cw(c38.759,44.714) 38.759,45.327 ; v1@38.326,45.507 ccw(c38.759,45.94) 38.759,45.327 ; v1@38.326,45.507 ccw(c38.759,45.94) 38.759,45.327 ; v1@38.326,45.507 ccw(c38.759,45.94) 38.759,45.327 ; v1@38.326,45.507 ccw(c38.759,45.94) 38.759,45.327 ; v1@38.326,45.507 ccw(c38.759,45.94) 38.759,45.327 ; v1@56.889,44.385 cw(c56.456,43.952) 57.069,43.952 ; v1@56.889,44.385 cw(c56.456,43.952) 57.069,43.952 ; v1@56.889,44.385 cw(c56.456,43.952) 57.069,43.952 ; v1@56.889,44.385 cw(c56.456,43.952) 57.069,43.952 ; v1@56.889,44.385 cw(c56.456,43.952) 57.069,43.952 ; 57.069,43.952 cw(c57.682,43.952) v1@57.249,44.385 ; 57.069,43.952 cw(c57.682,43.952) v1@57.249,44.385 ; 57.069,43.952 cw(c57.682,43.952) v1@57.249,44.385 ; 57.069,43.952 cw(c57.682,43.952) v1@57.249,44.385 ; 57.069,43.952 cw(c57.682,43.952) v1@57.249,44.385
HL2_drive: pad.24 R45.1 | length 65.7
  Top Layer w0.254: v1(37.384,44.438) R45.1@37.384,48.06 ; v1(58.085,44.184) 58.085,54.217 60.625,56.757 63.419,56.757 63.68,56.496 pad.24@63.68,55.114 ; v1@37.204,44.618 ccw(c36.771,45.051) 37.384,45.051 ; v1@37.204,44.618 ccw(c36.771,45.051) 37.384,45.051 ; v1@37.204,44.618 ccw(c36.771,45.051) 37.384,45.051 ; v1@37.204,44.618 ccw(c36.771,45.051) 37.384,45.051 ; v1@37.204,44.618 ccw(c36.771,45.051) 37.384,45.051 ; 37.384,45.051 ccw(c37.997,45.051) v1@37.564,44.618 ; 37.384,45.051 ccw(c37.997,45.051) v1@37.564,44.618 ; 37.384,45.051 ccw(c37.997,45.051) v1@37.564,44.618 ; 37.384,45.051 ccw(c37.997,45.051) v1@37.564,44.618 ; 37.384,45.051 ccw(c37.997,45.051) v1@37.564,44.618 ; v1@57.905,44.364 ccw(c57.472,44.797) 58.085,44.797 ; v1@57.905,44.364 ccw(c57.472,44.797) 58.085,44.797 ; v1@57.905,44.364 ccw(c57.472,44.797) 58.085,44.797 ; v1@57.905,44.364 ccw(c57.472,44.797) 58.085,44.797 ; v1@57.905,44.364 ccw(c57.472,44.797) 58.085,44.797 ; 58.085,44.797 ccw(c58.698,44.797) v1@58.265,44.364 ; 58.085,44.797 ccw(c58.698,44.797) v1@58.265,44.364 ; 58.085,44.797 ccw(c58.698,44.797) v1@58.265,44.364 ; 58.085,44.797 ccw(c58.698,44.797) v1@58.265,44.364 ; 58.085,44.797 ccw(c58.698,44.797) v1@58.265,44.364
  MidLayer1 w0.254: v1(37.384,44.438) 47.671,44.438 51.226,40.883 56.705,40.883 58.085,42.263 v1(58.085,44.184) ; v1@37.564,44.258 cw(c37.997,43.825) 37.997,44.438 ; v1@37.564,44.258 cw(c37.997,43.825) 37.997,44.438 ; v1@37.564,44.258 cw(c37.997,43.825) 37.997,44.438 ; v1@37.564,44.258 cw(c37.997,43.825) 37.997,44.438 ; v1@37.564,44.258 cw(c37.997,43.825) 37.997,44.438 ; v1@37.564,44.618 ccw(c37.997,45.051) 37.997,44.438 ; v1@37.564,44.618 ccw(c37.997,45.051) 37.997,44.438 ; v1@37.564,44.618 ccw(c37.997,45.051) 37.997,44.438 ; v1@37.564,44.618 ccw(c37.997,45.051) 37.997,44.438 ; v1@37.564,44.618 ccw(c37.997,45.051) 37.997,44.438 ; v1@57.905,44.004 cw(c57.472,43.571) 58.085,43.571 ; v1@57.905,44.004 cw(c57.472,43.571) 58.085,43.571 ; v1@57.905,44.004 cw(c57.472,43.571) 58.085,43.571 ; v1@57.905,44.004 cw(c57.472,43.571) 58.085,43.571 ; v1@57.905,44.004 cw(c57.472,43.571) 58.085,43.571 ; 58.085,43.571 cw(c58.698,43.571) v1@58.265,44.004 ; 58.085,43.571 cw(c58.698,43.571) v1@58.265,44.004 ; 58.085,43.571 cw(c58.698,43.571) v1@58.265,44.004 ; 58.085,43.571 cw(c58.698,43.571) v1@58.265,44.004 ; 58.085,43.571 cw(c58.698,43.571) v1@58.265,44.004
HL3_drive: pad.3 R43.1 | length 75
  Top Layer w0.254: v4(31.034,41.771) 31.923,41.771 R43.1@32.685,42.533 ; v1(75.103,38.596) 75.103,40.501 75.38,40.778 pad.3@75.38,42.314 ; v4@31.214,41.591 cw(c31.647,41.158) 31.647,41.771 ; v4@31.214,41.591 cw(c31.647,41.158) 31.647,41.771 ; v4@31.214,41.591 cw(c31.647,41.158) 31.647,41.771 ; v4@31.214,41.591 cw(c31.647,41.158) 31.647,41.771 ; v4@31.214,41.591 cw(c31.647,41.158) 31.647,41.771 ; v4@31.214,41.951 ccw(c31.647,42.384) 31.647,41.771 ; v4@31.214,41.951 ccw(c31.647,42.384) 31.647,41.771 ; v4@31.214,41.951 ccw(c31.647,42.384) 31.647,41.771 ; v4@31.214,41.951 ccw(c31.647,42.384) 31.647,41.771 ; v4@31.214,41.951 ccw(c31.647,42.384) 31.647,41.771 ; v1@74.923,38.776 ccw(c74.49,39.209) 75.103,39.209 ; v1@74.923,38.776 ccw(c74.49,39.209) 75.103,39.209 ; v1@74.923,38.776 ccw(c74.49,39.209) 75.103,39.209 ; v1@74.923,38.776 ccw(c74.49,39.209) 75.103,39.209 ; v1@74.923,38.776 ccw(c74.49,39.209) 75.103,39.209 ; 75.103,39.209 ccw(c75.716,39.209) v1@75.283,38.776 ; 75.103,39.209 ccw(c75.716,39.209) v1@75.283,38.776 ; 75.103,39.209 ccw(c75.716,39.209) v1@75.283,38.776 ; 75.103,39.209 ccw(c75.716,39.209) v1@75.283,38.776 ; 75.103,39.209 ccw(c75.716,39.209) v1@75.283,38.776
  MidLayer1 w0.254: v4(31.034,41.771) 32.304,40.501 50.079,40.501 50.713,39.867 57.197,39.867 60.23,42.9 74.228,42.9 75.103,42.025 v1(75.103,38.596) ; v4@31.034,41.517 cw(c31.034,40.904) 31.468,41.337 ; v4@31.034,41.517 cw(c31.034,40.904) 31.468,41.337 ; v4@31.034,41.517 cw(c31.034,40.904) 31.468,41.337 ; v4@31.034,41.517 cw(c31.034,40.904) 31.468,41.337 ; v4@31.034,41.517 cw(c31.034,40.904) 31.468,41.337 ; v4@31.288,41.771 ccw(c31.901,41.771) 31.468,41.337 ; v4@31.288,41.771 ccw(c31.901,41.771) 31.468,41.337 ; v4@31.288,41.771 ccw(c31.901,41.771) 31.468,41.337 ; v4@31.288,41.771 ccw(c31.901,41.771) 31.468,41.337 ; v4@31.288,41.771 ccw(c31.901,41.771) 31.468,41.337 ; v1@74.923,38.776 ccw(c74.49,39.209) 75.103,39.209 ; v1@74.923,38.776 ccw(c74.49,39.209) 75.103,39.209 ; v1@74.923,38.776 ccw(c74.49,39.209) 75.103,39.209 ; v1@74.923,38.776 ccw(c74.49,39.209) 75.103,39.209 ; v1@74.923,38.776 ccw(c74.49,39.209) 75.103,39.209 ; 75.103,39.209 ccw(c75.716,39.209) v1@75.283,38.776 ; 75.103,39.209 ccw(c75.716,39.209) v1@75.283,38.776 ; 75.103,39.209 ccw(c75.716,39.209) v1@75.283,38.776 ; 75.103,39.209 ccw(c75.716,39.209) v1@75.283,38.776 ; 75.103,39.209 ccw(c75.716,39.209) v1@75.283,38.776
HL3_out: Q30.6 R87.2 | length 14.6
  MidLayer1 w0.254: v1@7.7,7.846 cw(c7.7,7.233) 8.134,7.666 cw(c8.567,8.1) v1@7.954,8.1 ; v1(7.7,8.1) 9.2,6.6 v1(9.2,3.4) ; v1@9.02,3.58 ccw(c8.587,4.013) 9.2,4.013 ccw(c9.813,4.013) v1@9.38,3.58
  Bottom Layer w0.254: v1@7.52,7.92 cw(c7.087,7.487) 7.7,7.487 cw(c8.313,7.487) v1@7.88,7.92 ; v1(7.7,8.1) 7.7,7.1 8.638,6.162 R87.2@10.16,6.162 ; v1(9.2,3.4) 9.798,3.998 Q30.6@10.484,3.998 ; v1@9.2,3.654 ccw(c9.2,4.267) 9.634,3.834 ccw(c10.067,3.4) v1@9.454,3.4
HL3_ser: R87.1 U1.73 | length 52.5
  Top Layer w0.254: v1@5.75,38.996 cw(c5.75,38.383) 6.184,38.816 cw(c6.617,39.25) v1@6.004,39.25 ; v1(5.75,39.25) 6.2,38.8 9.7,38.8 10.719,39.819 U1.73@13.222,39.819
  MidLayer1 w0.254: v1@5.496,39.25 cw(c4.883,39.25) 5.316,38.816 cw(c5.75,38.383) v1@5.75,38.996 ; v1(5.75,39.25) 4.5,38 4.5,31.9 5,31.4 5,26.9 3.9,25.8 3.9,16.535 4.911,15.524 4.911,14.352 8.863,10.4 v1(12.8,10.4) ; v1@12.62,10.22 ccw(c12.187,9.787) 12.187,10.4 ccw(c12.187,11.013) v1@12.62,10.58
  Bottom Layer w0.254: R87.1@10.16,8.062 11.562,8.062 11.9,8.4 11.9,10.1 12.2,10.4 ; v1@12.618,10.223 ccw(c12.2,9.818) 12.2,10.4 ; v1@12.618,10.577 cw(c12.2,10.982) 12.2,10.4 ; v1(12.8,10.4) 12.2,10.4
HL3_split: Q30.2 R79.1 R80.1 | length 25.6
  Bottom Layer w0.254: Q30.2@12.484,3.048 11.652,3.048 11.5,3.2 11.5,4.3 11.8,4.6 15,4.6 16.085,5.685 25.471,5.685 26.286,6.5 30.1,6.5 31.37,5.23 R79.1@33.528,5.23
HL4_drive: pad.2 R44.1 | length 68.8
  Top Layer w0.254: R44.1@35.098,42.279 v1(35.987,42.279) ; v1(76.03,39.104) pad.2@76.03,42.314 ; R44.1@35.374,42.279 ccw(c35.374,42.892) v1@35.807,42.459 ; R44.1@35.374,42.279 cw(c35.374,41.666) v1@35.807,42.099 ; R44.1@35.374,42.279 ccw(c35.374,42.892) v1@35.807,42.459 ; R44.1@35.374,42.279 cw(c35.374,41.666) v1@35.807,42.099 ; R44.1@35.374,42.279 ccw(c35.374,42.892) v1@35.807,42.459 ; R44.1@35.374,42.279 cw(c35.374,41.666) v1@35.807,42.099 ; R44.1@35.374,42.279 ccw(c35.374,42.892) v1@35.807,42.459 ; R44.1@35.374,42.279 cw(c35.374,41.666) v1@35.807,42.099 ; R44.1@35.374,42.279 ccw(c35.374,42.892) v1@35.807,42.459 ; R44.1@35.374,42.279 cw(c35.374,41.666) v1@35.807,42.099 ; v1@75.85,39.284 ccw(c75.416,39.717) 76.03,39.717 ; v1@75.85,39.284 ccw(c75.416,39.717) 76.03,39.717 ; v1@75.85,39.284 ccw(c75.416,39.717) 76.03,39.717 ; v1@75.85,39.284 ccw(c75.416,39.717) 76.03,39.717 ; v1@75.85,39.284 ccw(c75.416,39.717) 76.03,39.717 ; 76.03,39.717 ccw(c76.643,39.717) v1@76.209,39.284 ; 76.03,39.717 ccw(c76.643,39.717) v1@76.209,39.284 ; 76.03,39.717 ccw(c76.643,39.717) v1@76.209,39.284 ; 76.03,39.717 ccw(c76.643,39.717) v1@76.209,39.284 ; 76.03,39.717 ccw(c76.643,39.717) v1@76.209,39.284
  MidLayer1 w0.254: v1(35.987,42.279) 37.257,41.009 50.289,41.009 50.923,40.375 56.943,40.375 59.976,43.408 74.482,43.408 76.03,41.86 v1(76.03,39.104) ; v1@35.987,42.025 cw(c35.987,41.412) 36.421,41.845 ; v1@35.987,42.025 cw(c35.987,41.412) 36.421,41.845 ; v1@35.987,42.025 cw(c35.987,41.412) 36.421,41.845 ; v1@35.987,42.025 cw(c35.987,41.412) 36.421,41.845 ; v1@35.987,42.025 cw(c35.987,41.412) 36.421,41.845 ; v1@36.241,42.279 ccw(c36.854,42.279) 36.421,41.845 ; v1@36.241,42.279 ccw(c36.854,42.279) 36.421,41.845 ; v1@36.241,42.279 ccw(c36.854,42.279) 36.421,41.845 ; v1@36.241,42.279 ccw(c36.854,42.279) 36.421,41.845 ; v1@36.241,42.279 ccw(c36.854,42.279) 36.421,41.845 ; v1@75.85,39.284 ccw(c75.416,39.717) 76.03,39.717 ; v1@75.85,39.284 ccw(c75.416,39.717) 76.03,39.717 ; v1@75.85,39.284 ccw(c75.416,39.717) 76.03,39.717 ; v1@75.85,39.284 ccw(c75.416,39.717) 76.03,39.717 ; v1@75.85,39.284 ccw(c75.416,39.717) 76.03,39.717 ; 76.03,39.717 ccw(c76.643,39.717) v1@76.209,39.284 ; 76.03,39.717 ccw(c76.643,39.717) v1@76.209,39.284 ; 76.03,39.717 ccw(c76.643,39.717) v1@76.209,39.284 ; 76.03,39.717 ccw(c76.643,39.717) v1@76.209,39.284 ; 76.03,39.717 ccw(c76.643,39.717) v1@76.209,39.284
HL4_out: Q30.3 R88.2 | length 10
  MidLayer1 w0.254: v1@12.42,5.72 cw(c11.987,5.287) 12.6,5.287 cw(c13.213,5.287) v1@12.78,5.72 ; v1(12.6,5.9) 12.6,4.6 13.314,3.886 v1(13.314,2.2) ; v1@13.134,2.38 ccw(c12.701,2.813) 13.314,2.813 ccw(c13.927,2.813) v1@13.494,2.38
  Bottom Layer w0.254: Q30.3@12.408,2.2 v1(13.314,2.2) ; v1@12.42,6.08 ccw(c11.987,6.513) 12.6,6.513 ccw(c13.213,6.513) v1@12.78,6.08 ; v1(12.6,5.9) 12.6,6.9 R88.2@12.8,7.1 ; v1@13.134,2.02 ccw(c12.701,1.587) 12.701,2.2 ccw(c12.701,2.813) v1@13.134,2.38
HL4_ser: R88.1 U1.71 | length 56.1
  Top Layer w0.254: v1(5.8,41) 6.7,41 7.6,40.1 9.4,40.1 10.119,40.819 U1.71@13.222,40.819 ; v1@5.98,40.82 cw(c6.413,40.387) 6.413,41 cw(c6.413,41.613) v1@5.98,41.18
  MidLayer1 w0.254: v1@5.62,40.82 ccw(c5.187,40.387) 5.187,41 ccw(c5.187,41.613) v1@5.62,41.18 ; v1(5.8,41) 4.9,41 3.5,39.6 3.5,31.528 4,31.028 4,27.3 2.9,26.2 2.9,16.1 3.896,15.104 3.896,13.952 9.048,8.8 v1(14.6,8.8) ; v1@14.42,8.62 ccw(c13.987,8.187) 13.987,8.8 ccw(c13.987,9.413) v1@14.42,8.98
  Bottom Layer w0.254: R88.1@12.8,9 R88.1@12.8,9.3 ; R88.1@13.2,8.8 v1(14.6,8.8) ; v1@14.42,8.62 ccw(c13.987,8.187) 13.987,8.8 ccw(c13.987,9.413) v1@14.42,8.98
HL4_split: Q30.5 R77.1 R78.1 | length 39.1
  Bottom Layer w0.254: Q30.5@10.7,2.9 10,2.9 9.785,2.685 8.911,2.685 8.411,3.185 8.411,4.611 8.985,5.185 14.911,5.185 15.871,6.145 25.171,6.145 26.126,7.1 34.9,7.1 38.002,3.998 R77.1@41.148,3.998
HL12_disable: pad.22 R47.1 R47.2 U1.67 | length 110.7
  Top Layer w0.254: v1@2.52,47.52 cw(c2.087,47.087) 2.7,47.087 cw(c3.313,47.087) v1@2.88,47.52 ; R47.1@2.54,44.77 2.54,43.26 2.981,42.819 U1.67@13.222,42.819 ; R47.2@2.7,46.8 v1(2.7,47.7) ; v1(62.149,41.771) pad.22@63.038,41.771 ; v1@62.329,41.591 cw(c62.762,41.158) 62.762,41.771 ; v1@62.329,41.591 cw(c62.762,41.158) 62.762,41.771 ; v1@62.329,41.591 cw(c62.762,41.158) 62.762,41.771 ; v1@62.329,41.591 cw(c62.762,41.158) 62.762,41.771 ; v1@62.329,41.591 cw(c62.762,41.158) 62.762,41.771 ; v1@62.329,41.951 ccw(c62.762,42.384) 62.762,41.771 ; v1@62.329,41.951 ccw(c62.762,42.384) 62.762,41.771 ; v1@62.329,41.951 ccw(c62.762,42.384) 62.762,41.771 ; v1@62.329,41.951 ccw(c62.762,42.384) 62.762,41.771 ; v1@62.329,41.951 ccw(c62.762,42.384) 62.762,41.771
  MidLayer1 w0.254: v1@2.52,47.52 cw(c2.087,47.087) 2.7,47.087 cw(c3.313,47.087) v1@2.88,47.52 ; v1(2.7,47.7) 2.7,46.1 4.9,43.9 9.6,43.9 13.6,47.9 24.6,47.9 25.6,46.9 25.6,45.648 26.248,45 26.726,45 29.426,47.7 35.301,47.7 36.3,46.701 36.3,44.7 34.9,43.3 31.1,43.3 30.3,42.5 30.3,41.3 31.639,39.961 49.9,39.961 50.503,39.359 57.451,39.359 59.863,41.771 v1(62.149,41.771) ; 61.536,41.771 ccw(c61.536,42.384) v1@61.969,41.951 ; 61.536,41.771 cw(c61.536,41.158) v1@61.969,41.591 ; 61.536,41.771 ccw(c61.536,42.384) v1@61.969,41.951 ; 61.536,41.771 cw(c61.536,41.158) v1@61.969,41.591 ; 61.536,41.771 ccw(c61.536,42.384) v1@61.969,41.951 ; 61.536,41.771 cw(c61.536,41.158) v1@61.969,41.591 ; 61.536,41.771 ccw(c61.536,42.384) v1@61.969,41.951 ; 61.536,41.771 cw(c61.536,41.158) v1@61.969,41.591 ; 61.536,41.771 ccw(c61.536,42.384) v1@61.969,41.951 ; 61.536,41.771 cw(c61.536,41.158) v1@61.969,41.591
HL12_enable: pad.20 R48.1 R48.2 U1.66 | length 112.5
  Top Layer w0.254: v1(2.2,48.6) 3,48.6 R48.2@4.9,46.7 ; v1@2.38,48.42 cw(c2.813,47.987) 2.813,48.6 cw(c2.813,49.213) v1@2.38,48.78 ; R48.1@4.572,44.77 4.572,43.728 4.981,43.319 U1.66@13.222,43.319 ; pad.20@64.33,42.314 64.33,40.57 65.6,39.3 v6(65.6,38.2) ; v6@65.42,38.38 ccw(c64.987,38.813) 65.6,38.813 ccw(c66.213,38.813) v6@65.78,38.38
  MidLayer1 w0.254: v1@1.946,48.6 cw(c1.333,48.6) 1.766,48.166 cw(c2.2,47.733) v1@2.2,48.346 ; v1(2.2,48.6) 1.6,48 1.6,46.496 4.696,43.4 9.8,43.4 13.785,47.385 24.415,47.385 25.1,46.7 25.1,45.5 26.1,44.5 26.9,44.5 29.624,47.224 35.104,47.224 35.824,46.504 35.824,44.897 34.703,43.776 30.903,43.776 29.824,42.697 29.824,41.103 31.441,39.485 49.703,39.485 50.303,38.885 65.415,38.885 65.6,38.7 ; v6@65.45,38.405 ccw(c65.235,38.7) 65.6,38.7 ; 65.451,38.849 cw(c65.009,38.406) v6(65.6,38.2) 65.6,38.7 ; v6@65.75,38.405 cw(c65.965,38.7) 65.6,38.7
HL12_feedback: C17.1 pad.21 R13.1 R13.2 R58.1 U1.92 | length 96.7
  Top Layer w0.254: U1.92@22.747,37.294 22.747,34.818 R13.1@26.589,30.976 ; C17.1@26.811,25.035 26.811,24.023 28.113,22.721 ; R58.1@27.351,19.546 27.351,20.689 28.113,21.451 28.113,22.721 ; pad.21@63.68,42.314 63.68,39.52 64.5,38.7 ; v6@64.323,38.282 ccw(c63.918,38.7) 64.5,38.7 ; v6(64.5,38.1) 64.5,38.7 ; v6@64.677,38.282 cw(c65.082,38.7) 64.5,38.7 ; 27.32,23.514 cw(c26.019,22.213) v1@27.859,22.213 ; 27.32,23.514 cw(c26.019,22.213) v1@27.859,22.213 ; 27.32,23.514 cw(c26.019,22.213) v1@27.859,22.213 ; 27.32,23.514 cw(c26.019,22.213) v1@27.859,22.213 ; 27.32,23.514 cw(c26.019,22.213) v1@27.859,22.213 ; 27.754,23.08 cw(c26.887,22.213) v1(28.113,22.213) ; 27.754,23.08 cw(c26.887,22.213) v1(28.113,22.213) ; 27.754,23.08 cw(c26.887,22.213) v1(28.113,22.213) ; 27.754,23.08 cw(c26.887,22.213) v1(28.113,22.213) ; 27.754,23.08 cw(c26.887,22.213) v1(28.113,22.213) ; v1@27.933,22.033 cw(c27.5,21.6) 28.113,21.6 ; v1@27.933,22.033 cw(c27.5,21.6) 28.113,21.6 ; v1@27.933,22.033 cw(c27.5,21.6) 28.113,21.6 ; v1@27.933,22.033 cw(c27.5,21.6) 28.113,21.6 ; v1@27.933,22.033 cw(c27.5,21.6) 28.113,21.6 ; v1@27.961,22.416 ccw(c27.732,22.721) 28.113,22.721 ; v1@27.961,22.416 ccw(c27.732,22.721) 28.113,22.721 ; v1@27.961,22.416 ccw(c27.732,22.721) 28.113,22.721 ; v1@27.961,22.416 ccw(c27.732,22.721) 28.113,22.721 ; v1@27.961,22.416 ccw(c27.732,22.721) 28.113,22.721 ; 28.113,21.6 cw(c28.726,21.6) v1@28.293,22.033 ; 28.113,21.6 cw(c28.726,21.6) v1@28.293,22.033 ; 28.113,21.6 cw(c28.726,21.6) v1@28.293,22.033 ; 28.113,21.6 cw(c28.726,21.6) v1@28.293,22.033 ; 28.113,21.6 cw(c28.726,21.6) v1@28.293,22.033 ; 28.113,22.721 ccw(c28.494,22.721) v1@28.265,22.416 ; 28.113,22.721 ccw(c28.494,22.721) v1@28.265,22.416 ; 28.113,22.721 ccw(c28.494,22.721) v1@28.265,22.416 ; 28.113,22.721 ccw(c28.494,22.721) v1@28.265,22.416 ; 28.113,22.721 ccw(c28.494,22.721) v1@28.265,22.416 ; 28.187,22.647 cw(c27.754,22.213) v1@28.367,22.213 ; 28.187,22.647 cw(c27.754,22.213) v1@28.367,22.213 ; 28.187,22.647 cw(c27.754,22.213) v1@28.367,22.213 ; 28.187,22.647 cw(c27.754,22.213) v1@28.367,22.213 ; 28.187,22.647 cw(c27.754,22.213) v1@28.367,22.213
  MidLayer1 w0.254: v1(28.113,22.213) 28.113,20.181 29.042,19.252 35.052,19.252 44.7,28.9 44.7,29.674 53.411,38.385 64.215,38.385 v6(64.5,38.1) ccw(c63.812,37.412) 63.812,38.385 ; 63.199,38.385 cw(c63.199,36.799) v6@64.32,37.92 ; v1@27.933,22.033 cw(c27.5,21.6) 28.113,21.6 ; v1@27.933,22.033 cw(c27.5,21.6) 28.113,21.6 ; v1@27.933,22.033 cw(c27.5,21.6) 28.113,21.6 ; v1@27.933,22.033 cw(c27.5,21.6) 28.113,21.6 ; v1@27.933,22.033 cw(c27.5,21.6) 28.113,21.6 ; 28.113,21.6 cw(c28.726,21.6) v1@28.293,22.033 ; 28.113,21.6 cw(c28.726,21.6) v1@28.293,22.033 ; 28.113,21.6 cw(c28.726,21.6) v1@28.293,22.033 ; 28.113,21.6 cw(c28.726,21.6) v1@28.293,22.033 ; 28.113,21.6 cw(c28.726,21.6) v1@28.293,22.033
HL12_status: pad.23 R49.1 U1.65 | length 99.7
  Top Layer w0.254: R49.1@6.8,44.7 7.681,43.819 U1.65@13.222,43.819 ; 8.809,43.819 v1(8.809,45.2) ; v4(59.228,43.803) 59.228,45.581 58.72,46.089 58.72,54.09 60.752,56.122 pad.23@63.038,56.122 ; v1@8.629,45.02 cw(c8.196,44.587) 8.809,44.587 ; v1@8.629,45.02 cw(c8.196,44.587) 8.809,44.587 ; v1@8.629,45.02 cw(c8.196,44.587) 8.809,44.587 ; v1@8.629,45.02 cw(c8.196,44.587) 8.809,44.587 ; v1@8.629,45.02 cw(c8.196,44.587) 8.809,44.587 ; 8.809,44.587 cw(c9.422,44.587) v1@8.989,45.02 ; 8.809,44.587 cw(c9.422,44.587) v1@8.989,45.02 ; 8.809,44.587 cw(c9.422,44.587) v1@8.989,45.02 ; 8.809,44.587 cw(c9.422,44.587) v1@8.989,45.02 ; 8.809,44.587 cw(c9.422,44.587) v1@8.989,45.02 ; v4@59.048,43.983 ccw(c58.615,44.416) 59.228,44.416 ; v4@59.048,43.983 ccw(c58.615,44.416) 59.228,44.416 ; v4@59.048,43.983 ccw(c58.615,44.416) 59.228,44.416 ; v4@59.048,43.983 ccw(c58.615,44.416) 59.228,44.416 ; v4@59.048,43.983 ccw(c58.615,44.416) 59.228,44.416 ; 59.228,44.416 ccw(c59.841,44.416) v4@59.408,43.983 ; 59.228,44.416 ccw(c59.841,44.416) v4@59.408,43.983 ; 59.228,44.416 ccw(c59.841,44.416) v4@59.408,43.983 ; 59.228,44.416 ccw(c59.841,44.416) v4@59.408,43.983 ; 59.228,44.416 ccw(c59.841,44.416) v4@59.408,43.983
  MidLayer1 w0.254: v1(8.809,45.2) 12.509,48.9 44.733,48.9 50.719,42.914 54.402,42.914 56.815,45.327 58.72,45.327 59.228,44.819 v4(59.228,43.803) ; v1@8.809,45.454 ccw(c8.809,46.067) 9.243,45.634 ; v1@8.809,45.454 ccw(c8.809,46.067) 9.243,45.634 ; v1@8.809,45.454 ccw(c8.809,46.067) 9.243,45.634 ; v1@8.809,45.454 ccw(c8.809,46.067) 9.243,45.634 ; v1@8.809,45.454 ccw(c8.809,46.067) 9.243,45.634 ; v1@9.063,45.2 cw(c9.676,45.2) 9.243,45.634 ; v1@9.063,45.2 cw(c9.676,45.2) 9.243,45.634 ; v1@9.063,45.2 cw(c9.676,45.2) 9.243,45.634 ; v1@9.063,45.2 cw(c9.676,45.2) 9.243,45.634 ; v1@9.063,45.2 cw(c9.676,45.2) 9.243,45.634 ; v4@59.048,43.983 ccw(c58.615,44.416) 59.228,44.416 ; v4@59.048,43.983 ccw(c58.615,44.416) 59.228,44.416 ; v4@59.048,43.983 ccw(c58.615,44.416) 59.228,44.416 ; v4@59.048,43.983 ccw(c58.615,44.416) 59.228,44.416 ; v4@59.048,43.983 ccw(c58.615,44.416) 59.228,44.416 ; 59.228,44.416 ccw(c59.841,44.416) v4@59.408,43.983 ; 59.228,44.416 ccw(c59.841,44.416) v4@59.408,43.983 ; 59.228,44.416 ccw(c59.841,44.416) v4@59.408,43.983 ; 59.228,44.416 ccw(c59.841,44.416) v4@59.408,43.983 ; 59.228,44.416 ccw(c59.841,44.416) v4@59.408,43.983